# EAGLE board PDU_v3.1 (EAGLE 9.6.2)
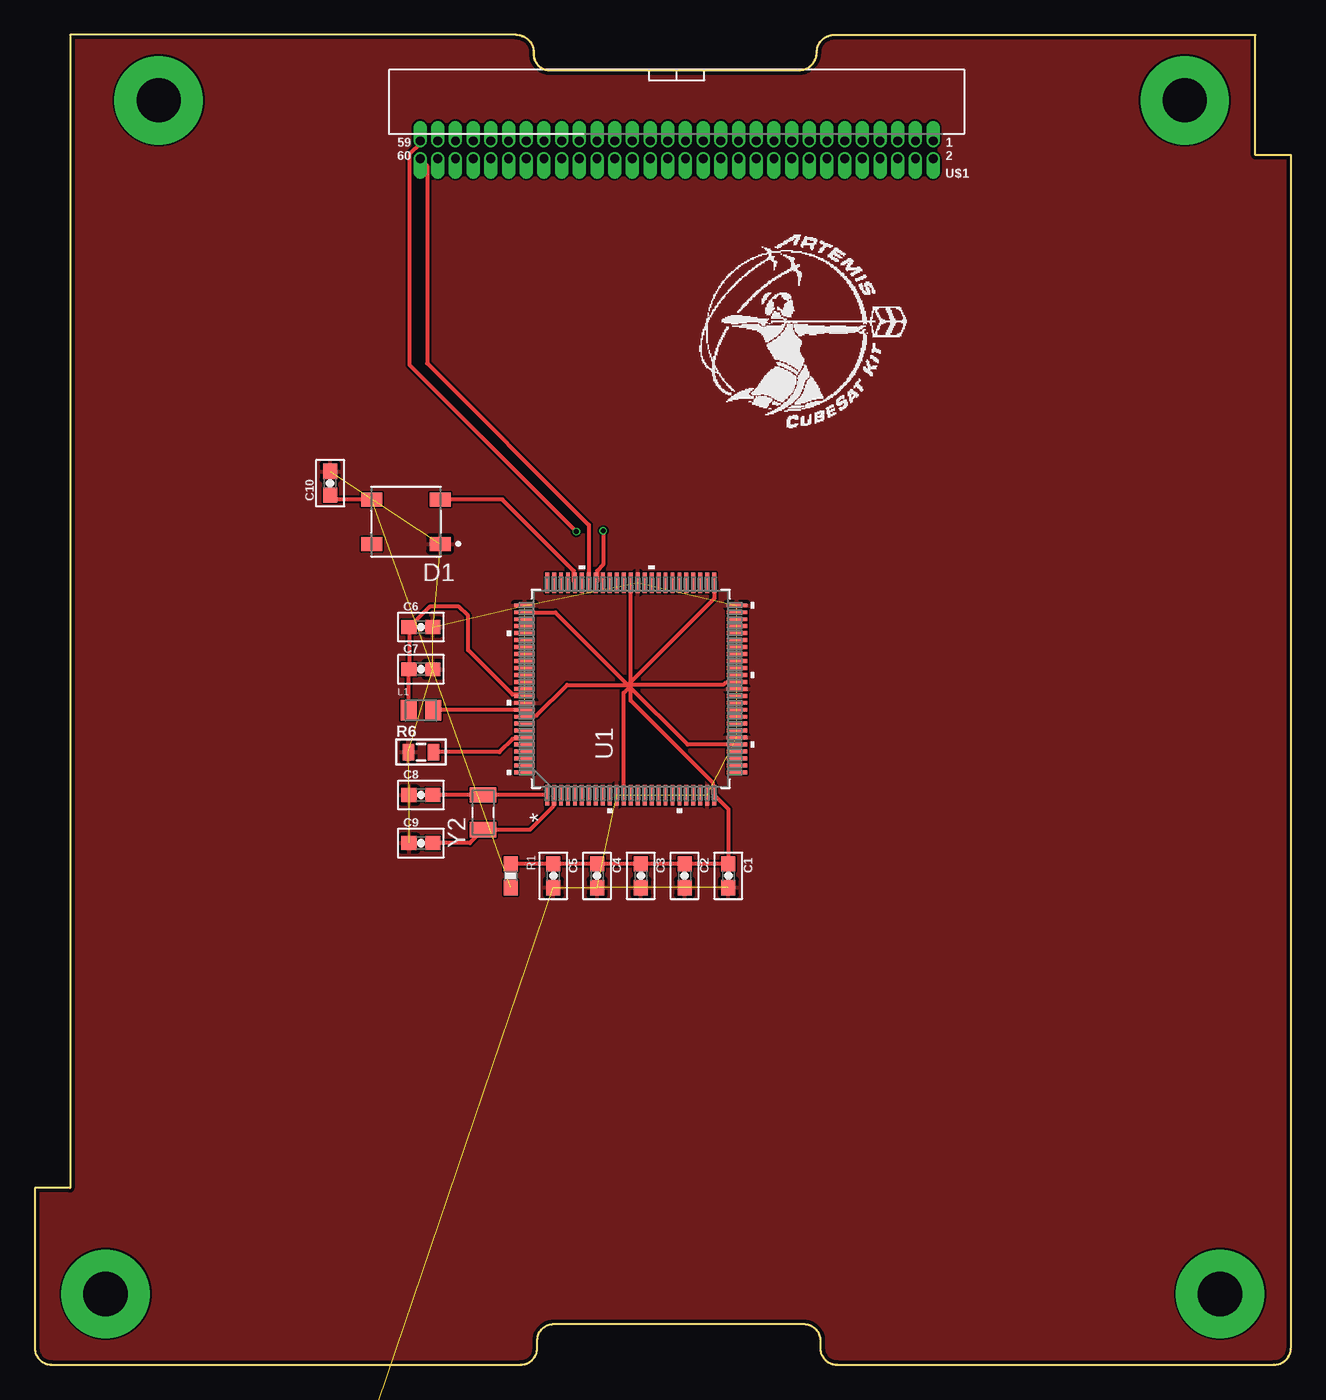
[diagram p0: board, top side]
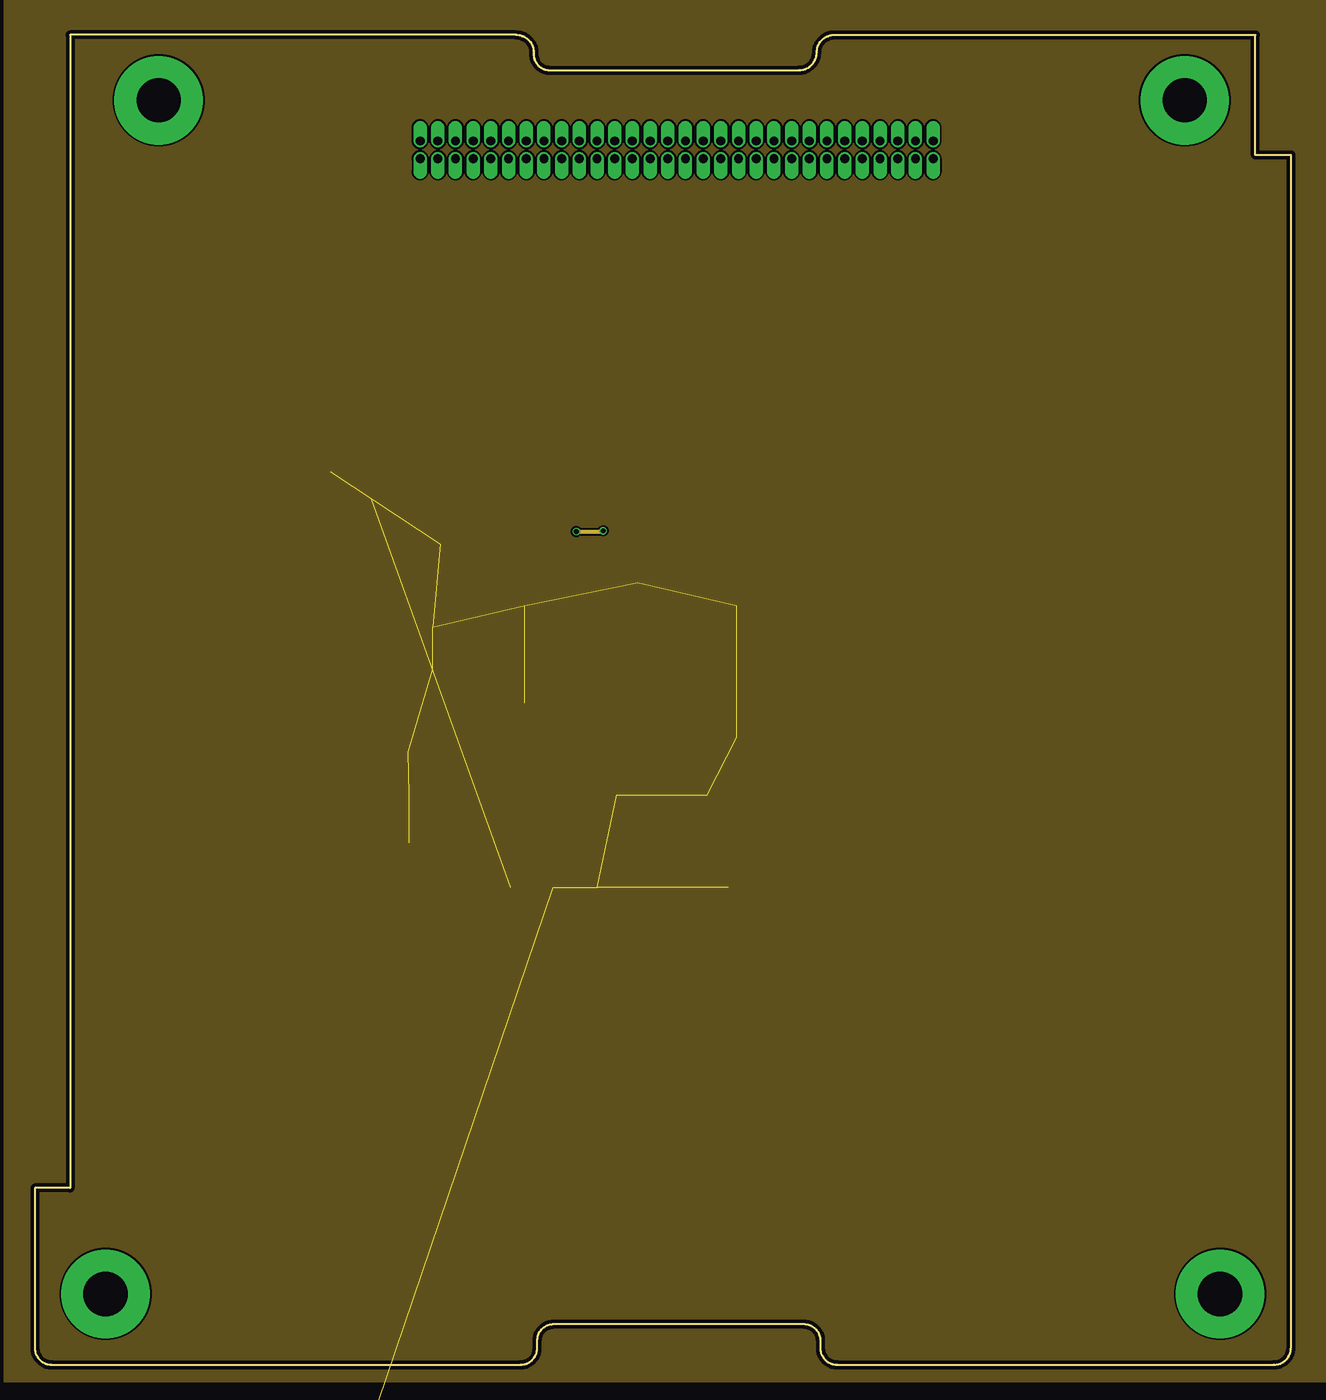
[diagram p1: board, inner layer Route2]
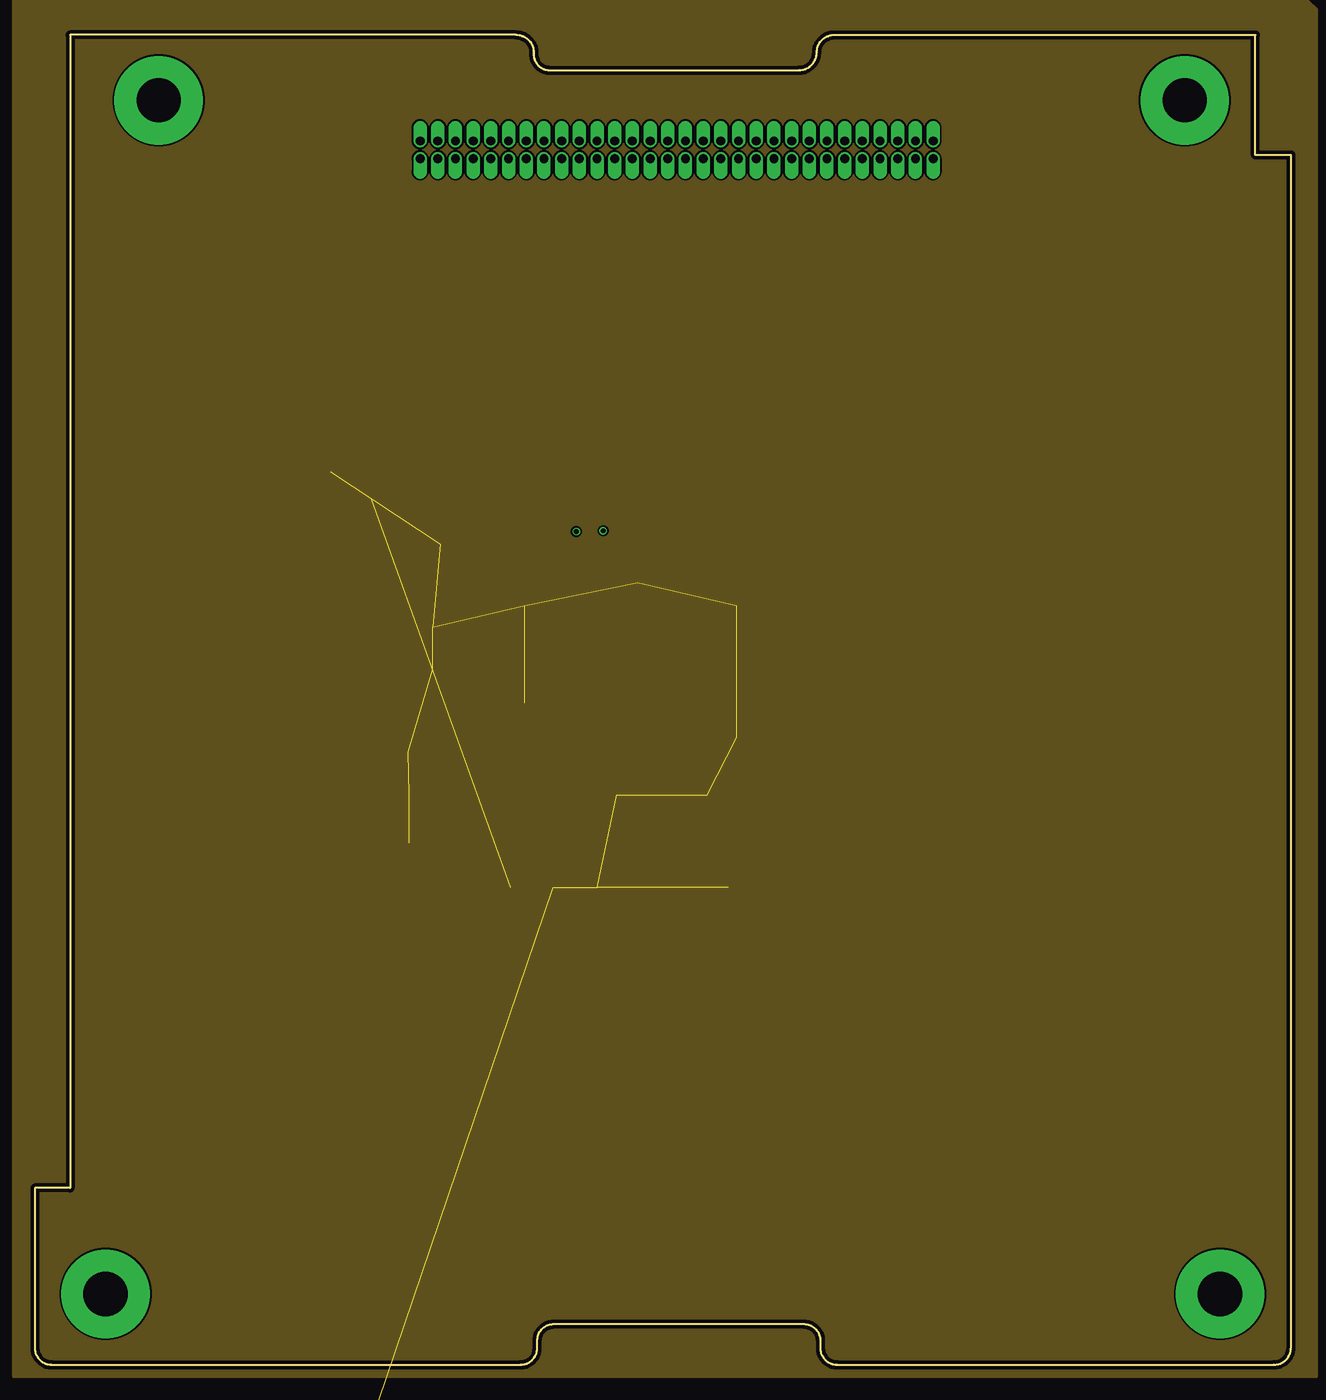
[diagram p2: board, inner layer Route15]
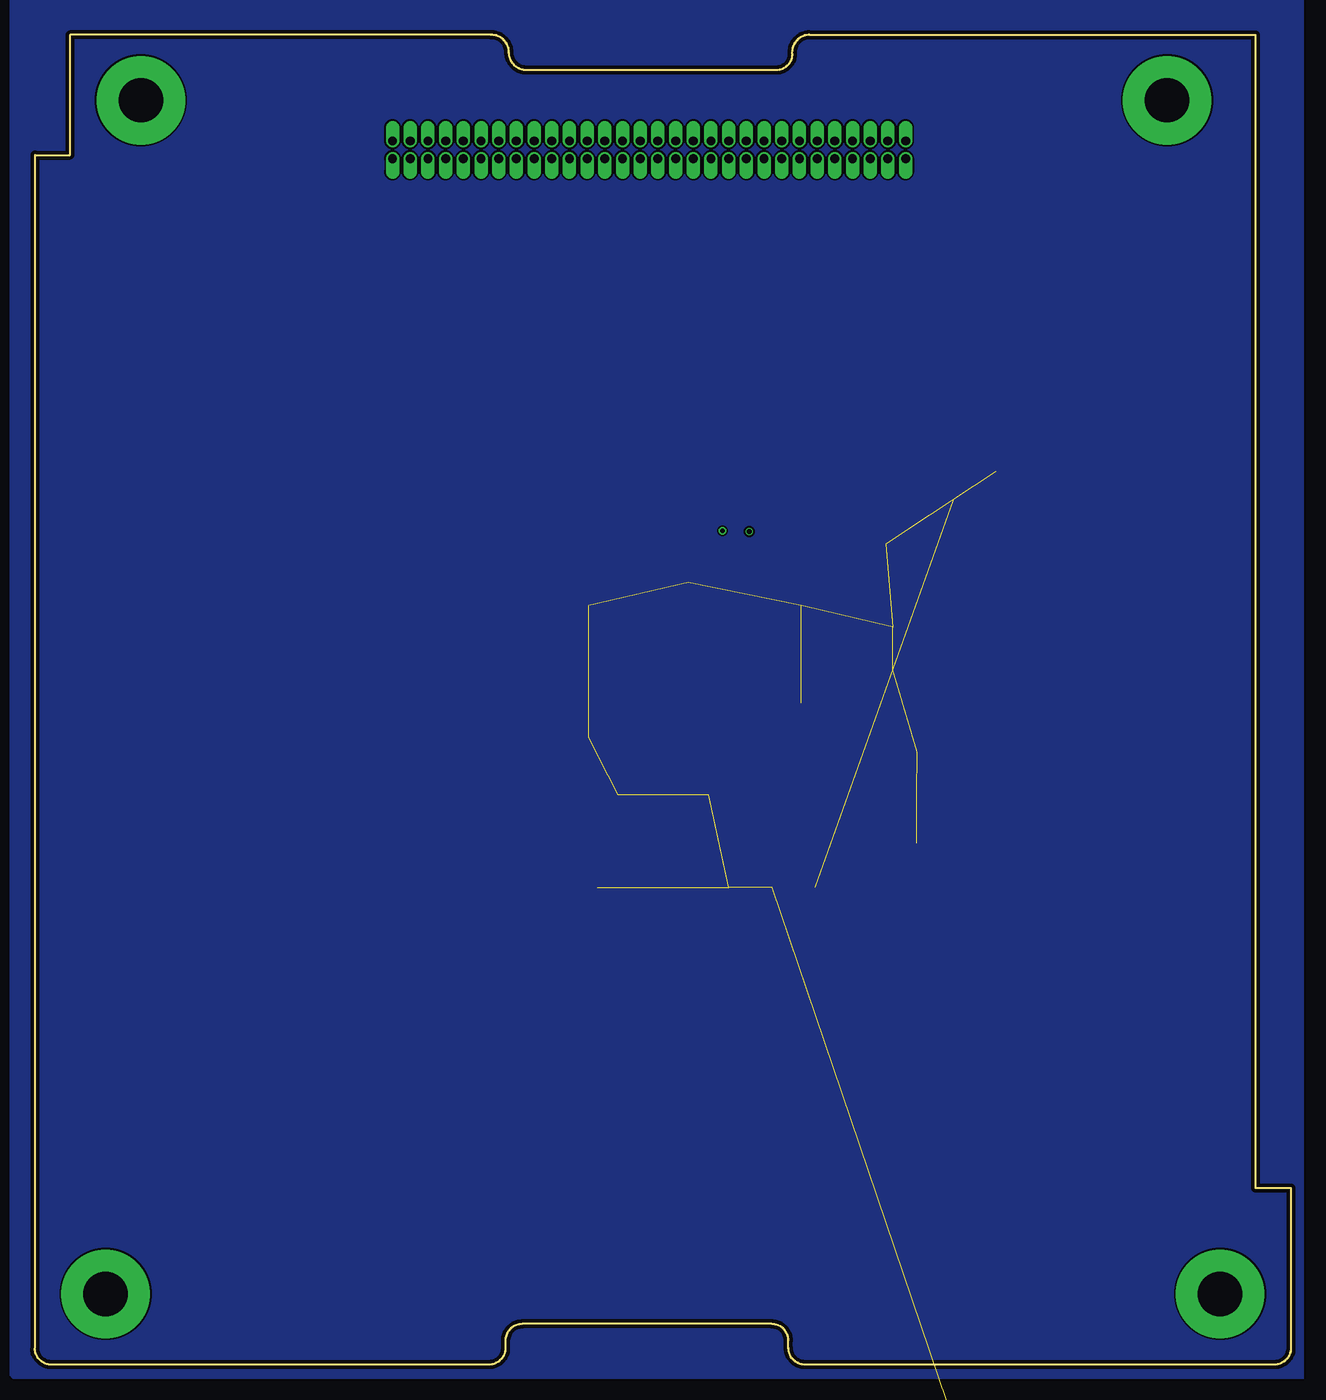
[diagram p3: board, bottom side, seen from below]

Size 90.17 x 95.5 mm. Coordinates in mm from the lower left corner, seen from the top.
Copper layers (1+2*15+16): Top 0.035mm / dielectric 1.5mm / Route2 0.035mm / dielectric 0.15mm / Route15 0.035mm / dielectric 0.2mm / Bottom 0.035mm
Design rules "default *": minimum track width 6mil, minimum drill 5mil, track to track 5mil, track to pad 5mil, pad to pad 5mil, via to via 5mil, smd to smd 5mil, copper to edge 10mil, drill to drill 5mil, minimum pad ring 1mil, minimum via ring 1mil, stop-mask expansion 0mil, vias tented up to drill 0mil, thermal gap 10mil

## Footprints (pad centres in the part's own frame; a part is rotated, then mirrored left to right if it is on the bottom)
0603-CAP = smd 1.1 x 1: 1 -0.85,0; 2 0.85,0
0805 = smd 0.8 x 1.2: 1 -0.9,0; 2 0.9,0
1210 = smd 1.2 x 2: 1 -1.6,0; 2 1.6,0
LED_1655 = smd 1.5 x 1: 1 -2.45,1.6; 2 -2.45,-1.6; 3 2.45,-1.6; 4 2.45,1.6
INDC2012X100N = smd 1.14 x 1.47: 1 -0.89,0; 2 0.89,0
IND_222NLT_PUL = smd 1.956 x 2.997: 1 -2.825,0; 2 2.825,0
0603-RES = smd 1.1 x 1: 1 -0.85,0; 2 0.85,0
TQFP100_14X14MC_MCH = smd 1.473 x 0.279: 1 -7.62,6; 2 -7.62,5.5; 3 -7.62,5; 4 -7.62,4.5; 5 -7.62,4; 6 -7.62,3.5; 7 -7.62,3; 8 -7.62,2.5; 9 -7.62,2; 10 -7.62,1.5; 11 -7.62,1; 12 -7.62,0.5; 13 -7.62,0; 14 -7.62,-0.5; 15 -7.62,-1; 16 -7.62,-1.5; 17 -7.62,-2; 18 -7.62,-2.5; 19 -7.62,-3; 20 -7.62,-3.5; 21 -7.62,-4; 22 -7.62,-4.5; 23 -7.62,-5; 24 -7.62,-5.5; 25 -7.62,-6; 51 7.62,-6; 52 7.62,-5.5; 53 7.62,-5; 54 7.62,-4.5; 55 7.62,-4; 56 7.62,-3.5; 57 7.62,-3; 58 7.62,-2.5; 59 7.62,-2; 60 7.62,-1.5; 61 7.62,-1; 62 7.62,-0.5; 63 7.62,0; 64 7.62,0.5; 65 7.62,1; 66 7.62,1.5; 67 7.62,2; 68 7.62,2.5; 69 7.62,3; 70 7.62,3.5; 71 7.62,4; 72 7.62,4.5; 73 7.62,5; 74 7.62,5.5; 75 7.62,6 | smd 0.279 x 1.473: 26 -6,-7.62; 27 -5.5,-7.62; 28 -5,-7.62; 29 -4.5,-7.62; 30 -4,-7.62; 31 -3.5,-7.62; 32 -3,-7.62; 33 -2.5,-7.62; 34 -2,-7.62; 35 -1.5,-7.62; 36 -1,-7.62; 37 -0.5,-7.62; 38 0,-7.62; 39 0.5,-7.62; 40 1,-7.62; 41 1.5,-7.62; 42 2,-7.62; 43 2.5,-7.62; 44 3,-7.62; 45 3.5,-7.62; 46 4,-7.62; 47 4.5,-7.62; 48 5,-7.62; 49 5.5,-7.62; 50 6,-7.62; 76 6,7.62; 77 5.5,7.62; 78 5,7.62; 79 4.5,7.62; 80 4,7.62; 81 3.5,7.62; 82 3,7.62; 83 2.5,7.62; 84 2,7.62; 85 1.5,7.62; 86 1,7.62; 87 0.5,7.62; 88 0,7.62; 89 -0.5,7.62; 90 -1,7.62; 91 -1.5,7.62; 92 -2,7.62; 93 -2.5,7.62; 94 -3,7.62; 95 -3.5,7.62; 96 -4,7.62; 97 -4.5,7.62; 98 -5,7.62; 99 -5.5,7.62; 100 -6,7.62
MSOP-10_MSE = smd 1.397 x 0.279: 1 -2.184,1.001; 2 -2.184,0.5; 3 -2.184,0; 4 -2.184,-0.5; 5 -2.184,-1.001; 6 2.184,-1.001; 7 2.184,-0.5; 8 2.184,0; 9 2.184,0.5; 10 2.184,1.001 | smd 1.93 x 2.159: 11 0,0
PC104_WCONN_BACKPLANE_HEADER = drill 0.635 pad 0.965 offset: 1 64.489,87.884; 2 64.489,86.614; 3 63.219,87.884; 4 63.219,86.614; 5 61.949,87.884; 6 61.949,86.614; 7 60.679,87.884; 8 60.679,86.614; 9 59.409,87.884; 10 59.409,86.614; 11 58.139,87.884; 12 58.139,86.614; 13 56.869,87.884; 14 56.869,86.614; 15 55.599,87.884; 16 55.599,86.614; 17 54.329,87.884; 18 54.329,86.614; 19 53.059,87.884; 20 53.059,86.614; 21 51.789,87.884; 22 51.789,86.614; 23 50.519,87.884; 24 50.519,86.614; 25 49.249,87.884; 26 49.249,86.614; 27 47.979,87.884; 28 47.979,86.614; 29 46.709,87.884; 30 46.709,86.614; 31 45.439,87.884; 32 45.439,86.614; 33 44.169,87.884; 34 44.169,86.614; 35 42.899,87.884; 36 42.899,86.614; 37 41.629,87.884; 38 41.629,86.614; 39 40.359,87.884; 40 40.359,86.614; 41 39.089,87.884; 42 39.089,86.614; 43 37.819,87.884; 44 37.819,86.614; 45 36.549,87.884; 46 36.549,86.614; 47 35.279,87.884; 48 35.279,86.614; 49 34.009,87.884; 50 34.009,86.614; 51 32.739,87.884; 52 32.739,86.614; 53 31.469,87.884; 54 31.469,86.614; 55 30.199,87.884; 56 30.199,86.614; 57 28.929,87.884; 58 28.929,86.614; 59 27.659,87.884; 60 27.659,86.614 | drill 3.175 pad 6.35: P$1 5.08,5.08; P$2 85.09,5.08; P$3 82.55,90.805; P$4 8.89,90.805
XTAL_ABS07-32.768KHZ-T = smd 1.1 x 1.9: 1 -1.25,0; 2 1.25,0

## Placement (x,y rotation side)
C1  10 uF  [0603-CAP]  49.79,35.11 270 top
C2  1 uF  [0603-CAP]  46.65,35.11 270 top
C3  1 uF  [0603-CAP]  43.5,35.11 270 top
C4  0.1 uF  [0603-CAP]  40.36,35.11 270 top
C5  0.1 uF  [0603-CAP]  37.22,35.11 270 top
C6  10 uF  [0603-CAP]  27.72,52.97 0 top
C7  1 uF  [0603-CAP]  27.72,49.94 0 top
C8  22 pF  [0603-CAP]  27.72,40.91 0 top
C9  22 pF  [0603-CAP]  27.72,37.46 0 top
C10  0.1 uF  [0603-CAP]  21.2,63.3 90 top
C31  0.1 uF  [0805]  4.53,-47.05 0 top  (outside the outline)
C32  1 uF  [0805]  8.68,-47.05 0 top  (outside the outline)
C33  0.1 uF  [0805]  12.83,-47.05 0 top  (outside the outline)
C34  4.7 uF  [0805]  -0.76,-53.11 0 top  (outside the outline)
C35  10 pF  [0805]  3.4,-53.11 0 top  (outside the outline)
C36  47 uF  [1210]  -0.4,-47.78 0 top  (outside the outline)
C100  4.7 uF  [0805]  7.55,-53.11 0 top  (outside the outline)
D1  1655  [LED_1655]  26.65,60.54 180 top
L1  10 uH  [INDC2012X100N]  27.72,46.98 0 top
L3  PA4341.222NLT  [IND_222NLT_PUL]  4.37,-41.14 0 top  (outside the outline)
R1  10 k  [0603-RES]  34.15,35.11 270 top
R6  10 k  [0805]  27.72,43.99 0 top
R22  18.2 k  [0805]  11.7,-53.11 0 top  (outside the outline)
R23  187 k  [0805]  15.85,-53.11 0 top  (outside the outline)
R24  47 k  [0805]  -0.76,-57.96 0 top  (outside the outline)
R25  1 M  [0805]  3.4,-57.96 0 top  (outside the outline)
R45  0  [0805]  7.55,-57.96 0 top  (outside the outline)
R50  1 M  [0805]  11.7,-57.96 0 top  (outside the outline)
U1  ATSAME51N19A-AF  [TQFP100_14X14MC_MCH]  42.78,48.53 90 top
U22  LT8609A  [MSOP-10_MSE]  -0.06,-63.28 0 top  (outside the outline)
U$1  V2_BOARD_60PIN  [PC104_WCONN_BACKPLANE_HEADER]  0,0 0 top
Y2  ABS07-32.768KHZ-T  [XTAL_ABS07-32.768KHZ-T]  32.19,39.66 90 top

## Library data of the parts
C1-C10 C31-C36 C100 R1 R6 R22-R25 R45 R50 U22 = HSFL_Main_Library
D1 = Artemis; DESCRIPTION: Ws2812b 5050 Rgb Led With Integrated Driver Chip Pack Of 10; MF: Adafruit; MP: 1655; PACKAGE: Adafruit
L1 = Artemis; DESCRIPTION: 10µH Unshielded Wirewound Inductor 370mA 1.3Ohm Max 0805 (2012 Metric); DIGI-KEY_PART_NUMBER: 587-1632-1-ND; MF: Taiyo Yuden; MP: CBL2012T100M; PACKAGE: 2012 Taiyo Yuden
L3 = Artemis; COPYRIGHT: Copyright (C) 2021 Ultra Librarian. All rights reserved.; DIGI-KEY_PART_NUMBER_1: 553-3409-2-ND; DIGI-KEY_PART_NUMBER_2: 553-3409-1-ND; DIGI-KEY_PART_NUMBER_3: 553-3409-6-ND; MANUFACTURER_PART_NUMBER: PA4341.222NLT; MFR_NAME: Pulse Electronics Corporation
U1 = Artemis; BUILT_BY: EMA_Molly; COPYRIGHT: Copyright (C) 2018 Accelerated Designs. All rights reserved; MANUFACTURER_PART_NUMBER: ATSAME51N19A-AF; SOURCELIBRARY: Microchip_2019-08-23_25; VENDOR: Microchip
U$1 = Artemis v2 board
Y2 = Artemis; DESCRIPTION: 32.768kHz ±20ppm Crystal 12.5pF 70 kOhms 2-SMD, No Lead; DIGI-KEY_PART_NUMBER: 535-9542-1-ND; MF: Abracon; MP: ABS07-32.768KHZ-T; PACKAGE: SMD-2 Abracon LLC; PURCHASE-URL: https://pricing.snapeda.com/search/part/ABS07-32.768KHZ-T/?ref=eda

## Nets
5V_BURN: U1.37
BURN1_EN: U1.96
BURN2_EN: U1.49
BUS_3V3: C10.1 D1.3 R1.2
BUS_5V: C35.2 C36.1 C100.1 L3.1 R24.2 R25.2
BUS_5V_FB: C35.1 R23.2 R25.1 U22.6
BUS_5V_PG: R24.1 U22.8
BUS_5V_TRSS: C31.1 U22.7
BUS_5V_VIN_EN: R45.1 R50.2 U22.10
CCO_2: C8.2 U1.1 Y2.2
CCO_3: C9.2 U1.2 Y2.1
CHRG: U1.70
FAULT1: U1.53
FAULT2: U1.52
GND: C1.2 C2.2 C3.2 C4.2 C5.2 C6.2 C7.2 C8.1 C9.1 C10.2 C31.2 C32.2 C34.2 C36.2 C100.2 D1.1 R6.1 R22.1 R23.1 R50.1 U1.11 U1.24 U1.31 U1.38 U1.50 U1.62 U1.76 U1.90 U22.5 U22.11
IN1: U1.41
IN2: U1.42
IN3: U1.45
IN4: U1.44
IN5: U1.55
IN6: U1.56
IN7: U1.59
IN8: U1.58
LED: D1.2 U1.71
N$1: C6.1 C7.1 L1.1 U1.89
N$2: L1.2 U1.91
N$22: U$1.57
N$23: U$1.55
N$24: U$1.53
N$25: R22.2 U22.4
N$27: C32.1 U22.3
N$28: C33.1 U22.1
N$29: C33.2 L3.2 U22.2
N$32: U$1.58
N$33: U$1.56
N$34: U$1.54
N$35: U$1.52
N$36: U$1.51
N$37: U$1.49
N$39: U$1.50
RESET: U1.88
SD_CS: U1.87
SD_MISO: U1.48
SD_MOSI: U1.46
SD_SCK: U1.47
SHDN: U1.36
SLEEP1: U1.40
SLEEP2: U1.54
SW_3V3_EN1: U1.64
SW_3V3_EN2: U1.65
SW_5V_EN1: U1.67
SW_5V_EN2: U1.66
SW_5V_EN3: U1.78
SW_5V_EN4: U1.79
SW_VBATT_EN: U1.80
SWCLK: U1.93
SWDIO: U1.94
TRQ1: U1.43
TRQ2: U1.57
UART2_RXD: U1.69 U$1.60
UART2_TXD: U1.68 U$1.59
USB_D+: U1.75
USB_D-: U1.74
VBATT: C34.1 R45.2 U22.9
VDD2: C1.1 C2.1 C3.1 C4.1 C5.1 R1.1 U1.12 U1.25 U1.30 U1.39 U1.51 U1.63 U1.77 U1.92
WDT_WDI: R6.2 U1.95

## Tracks (layer width: path | path; a pad name or v marks a point on that pad's centre or on a via)
BUS_3V3  (1 unrouted)
  Top 0.305: D1.3 21.51,62.14 C10.1
CCO_2
  Top 0.305: U1.1 Y2.2 C8.2
CCO_3
  Top 0.305: U1.2 37.21,40.84 37.21,40.07 35.55,38.41 Y2.1 31.24,37.46 C9.2
GND  (29 unrouted)
  pour Top: -2.84,-2.03 -2.84,99.96 92.95,99.96 93.68,99.24 93.68,-1.37 93.01,-2.03
  pour Route2: -2.18,99.36 -2.18,-1.19 92.86,-1.19 92.86,99.14 -1.96,99.14
  pour Route15: -1.57,98.6 -1.57,-0.86 92.05,-0.86 92.05,97.33 90.78,98.6
  pour Bottom (rank 2): 91.95,98.3 91.95,-0.74 91.74,-0.94 -0.89,-0.94 -0.89,98.04 91.69,98.04
LED
  Top 0.305: U1.71 38.7,56.23 38.7,57.01 33.56,62.14 D1.2
N$1
  Top 0.305: L1.1 26.83,49.9 C7.1 C6.1 28.34,54.45 30.44,54.45 31.1,53.78 31.1,51.31 34.3,48.11 35.08,48.11 U1.89
N$2
  Top 0.305: U1.91 28.66,47.03 L1.2
UART2_RXD
  Top 0.305: U$1.60 28.17,86.11 28.17,71.92 39.78,60.31 U1.69
UART2_TXD  (via drill 0.35)
  Top 0.305: U$1.59 27.66,87.69 26.9,86.93 26.9,71.82 v38.88,59.84 | U1.68 40.36,56.23 40.36,57.01 40.8,57.45 v40.8,59.89
  Route2 0.305: v38.88,59.84 40.75,59.84 v40.8,59.89
VBATT  (2 unrouted)
VDD2
  Top 0.305: U1.77 37.36,54.03 42.57,48.82 | 42.57,48.82 42.78,49.03 | 42.78,49.03 U1.63 | U1.51 48.78,55.03 42.78,49.03 | U1.39 50.32,48.95 49.55,48.95 49.41,48.82 42.86,48.82 | 42.86,48.82 42.57,48.82 | U1.30 46.86,44.53 42.57,48.82 | 42.78,49.03 42.78,47.68 48.7,41.77 48.7,40.99 U1.25 49.79,39.9 C1.1 C2.1 C3.1 C4.1 C5.1 | U1.12 42.28,48.24 42.86,48.82 | U1.92 35.24,46.61 36.01,46.61 38.22,48.82 42.57,48.82 | C5.1 | C5.1 R1.1
WDT_WDI
  Top 0.305: U1.95 35.08,44.95 34.3,44.95 33.34,43.99 R6.2